# Altium PCB panel_led.PcbDoc (part 1 of 2)
Units mm, origin at the board's own origin, x right, y up, seen from the top; angles counter-clockwise.
Board outline 185.25 x 285.25 mm, 2 copper layers (Top Layer, Bottom Layer); 460 components, 231 nets, 1602 pads, 0 vias.
Unrouted connection lines stored in the file: 3.
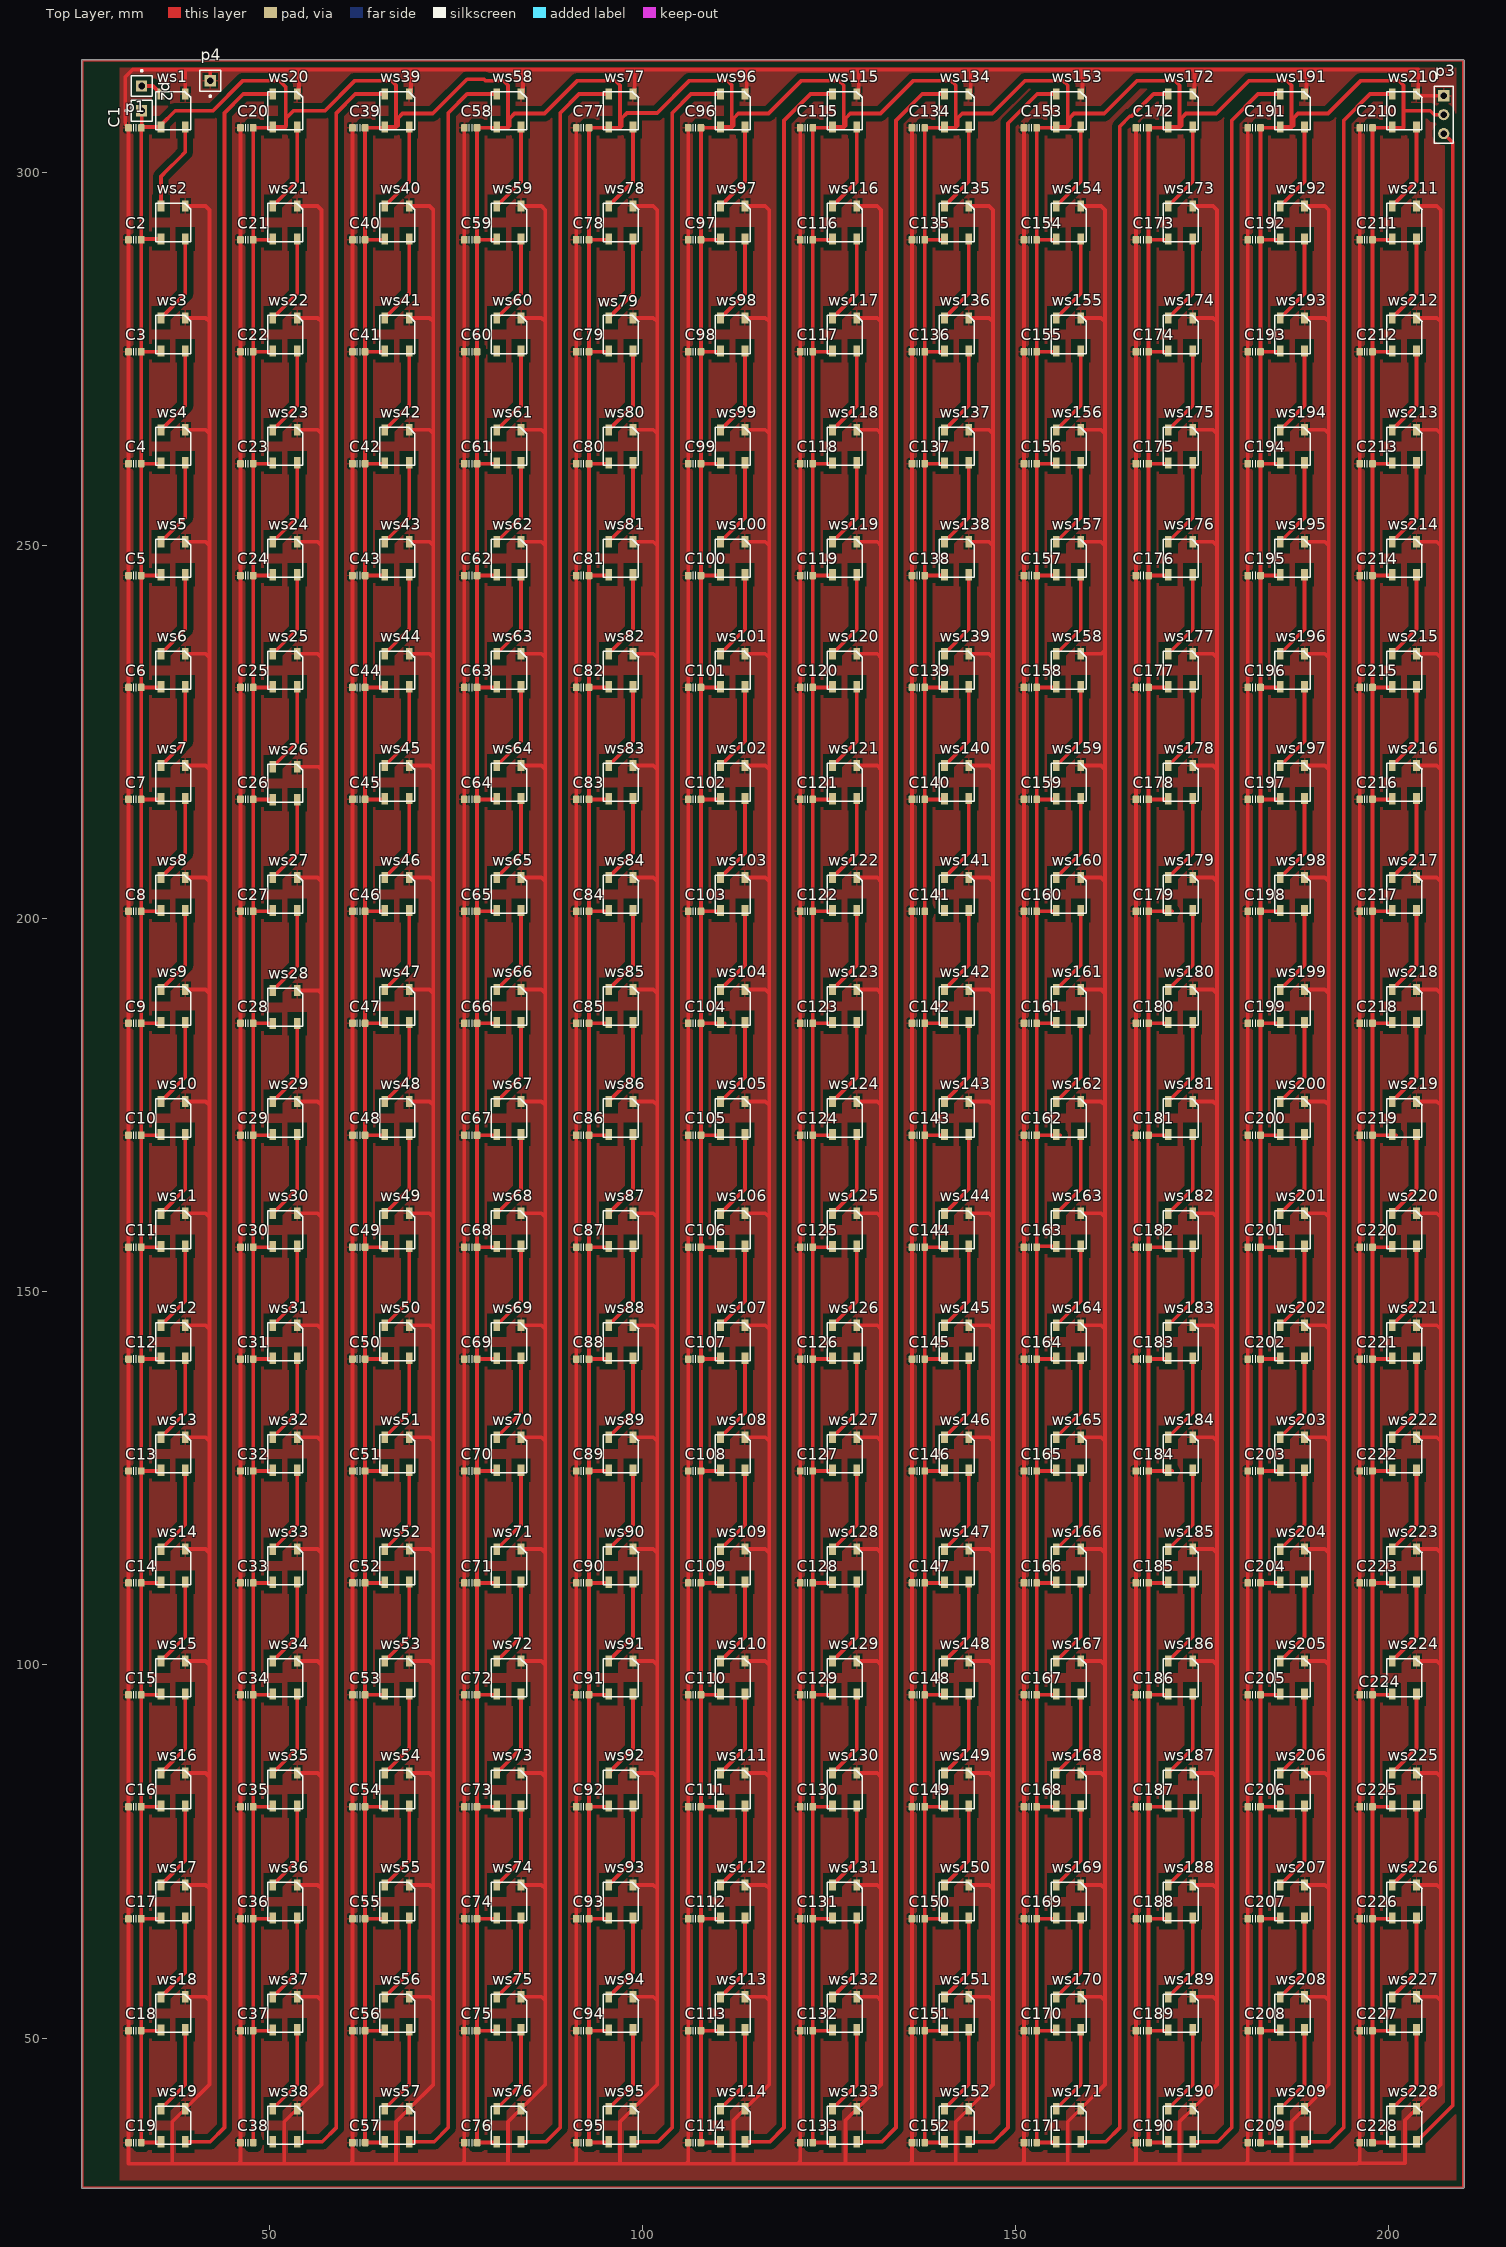
[diagram p0: Top Layer view]
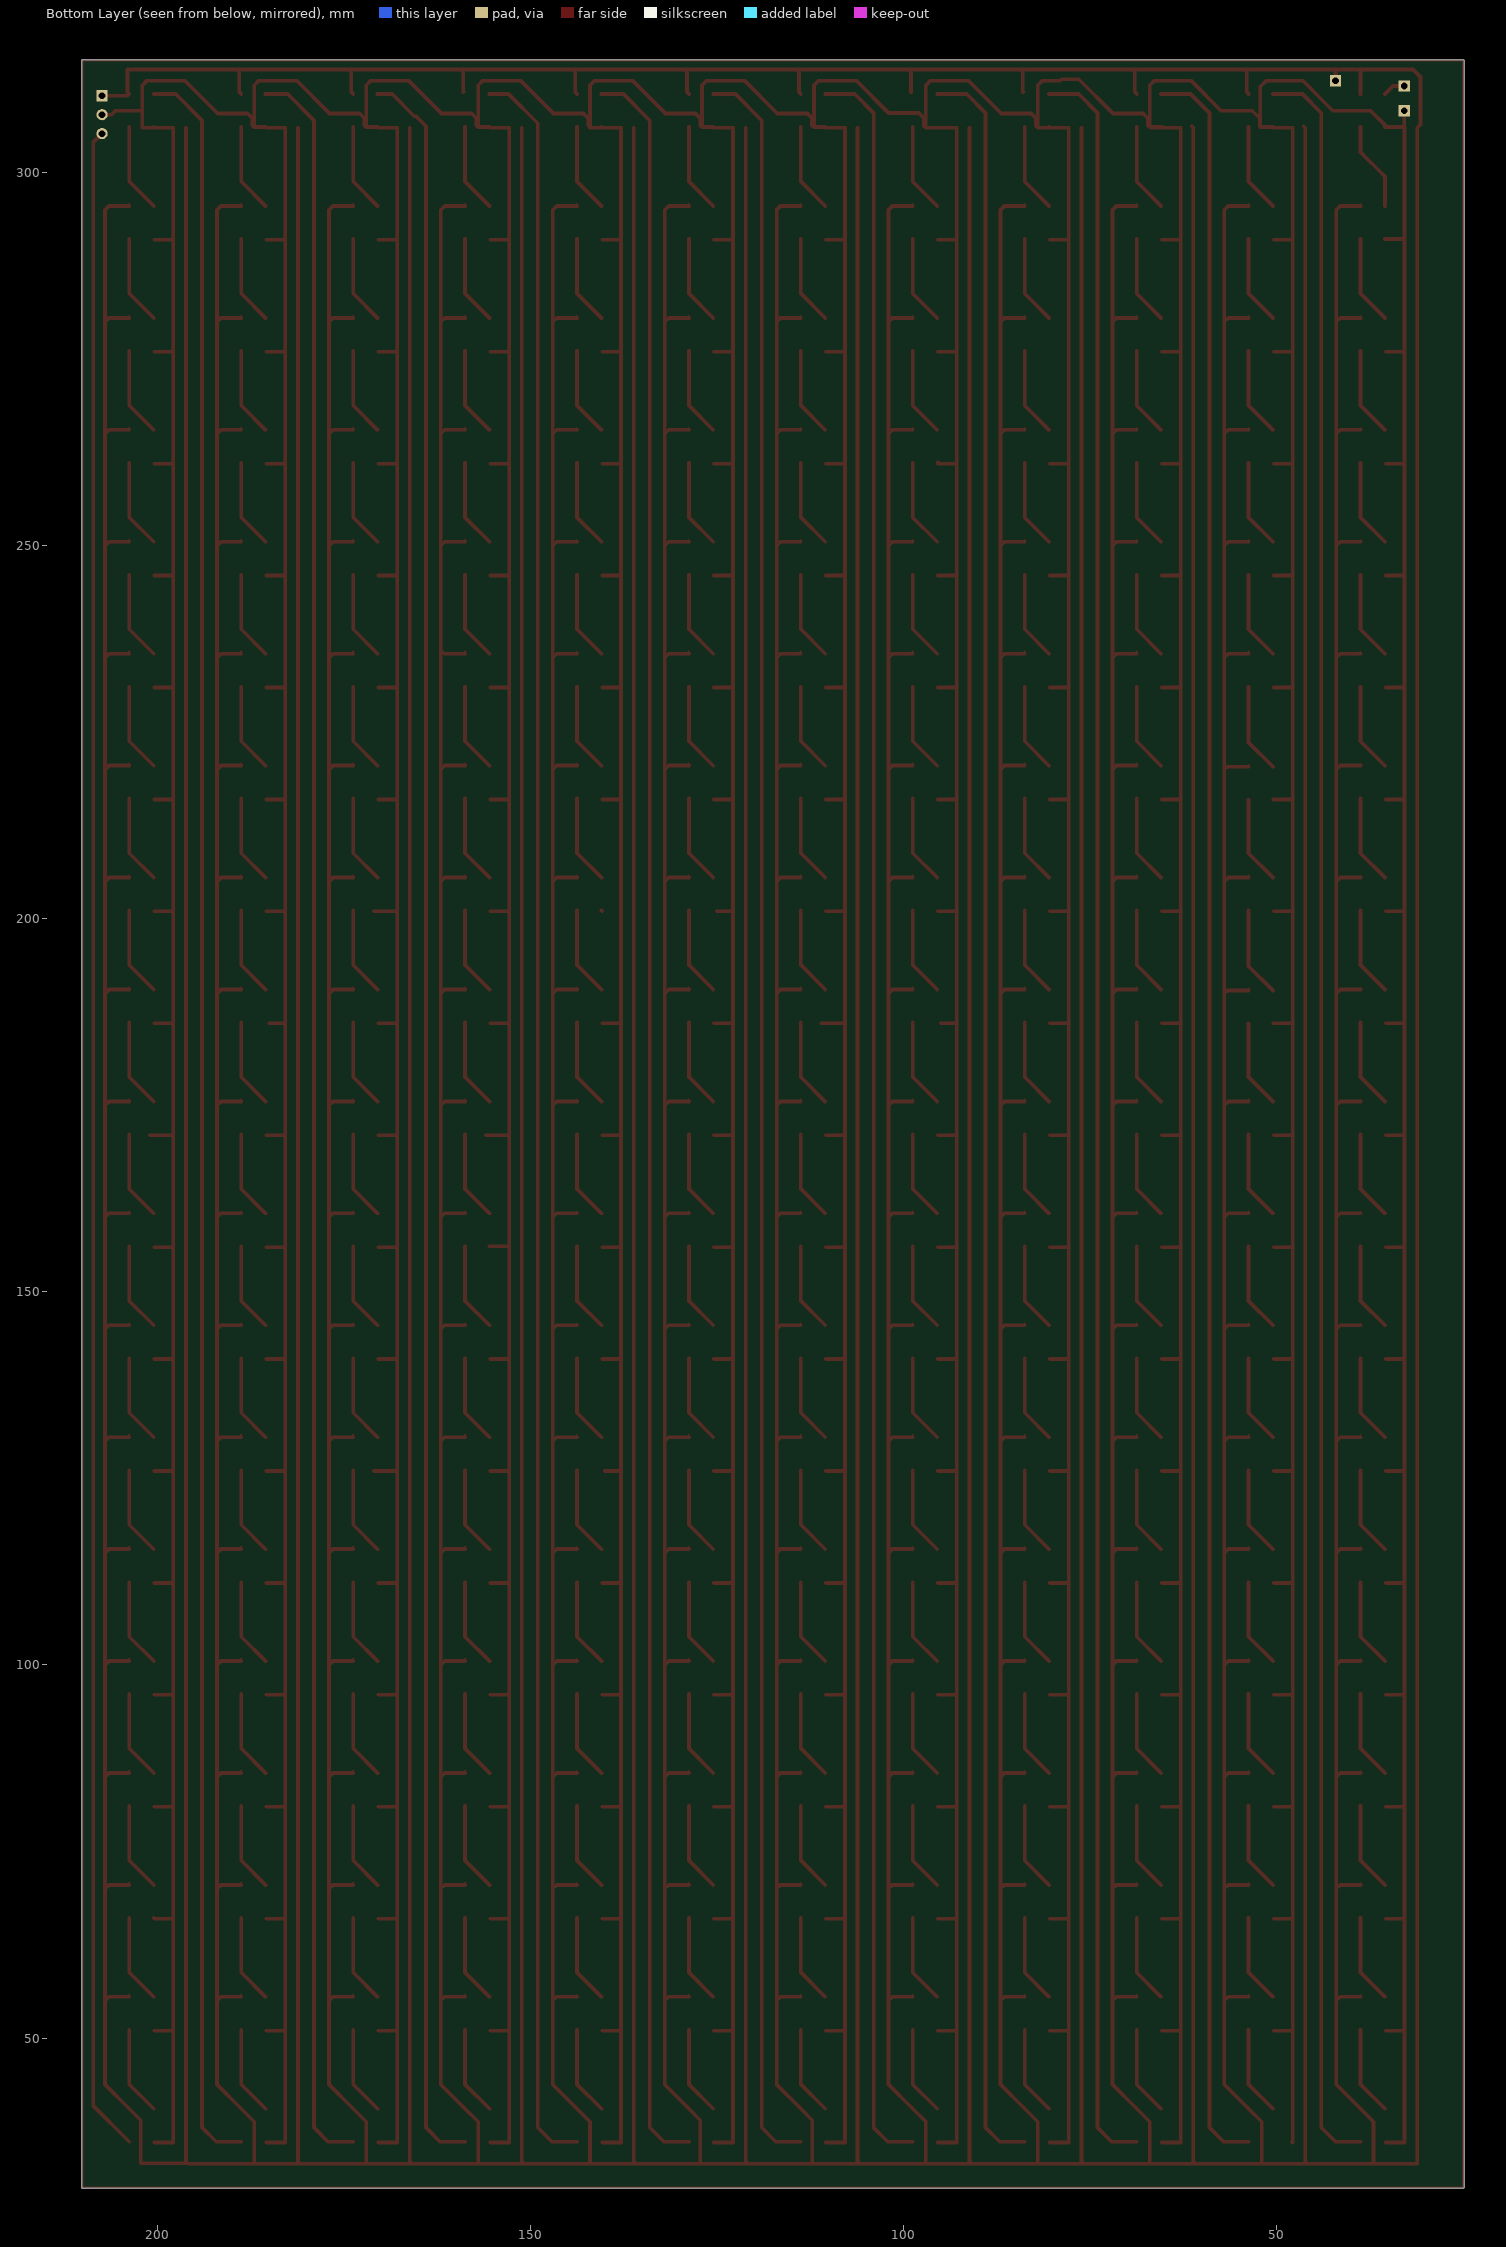
[diagram p1: Bottom Layer view, seen from below]
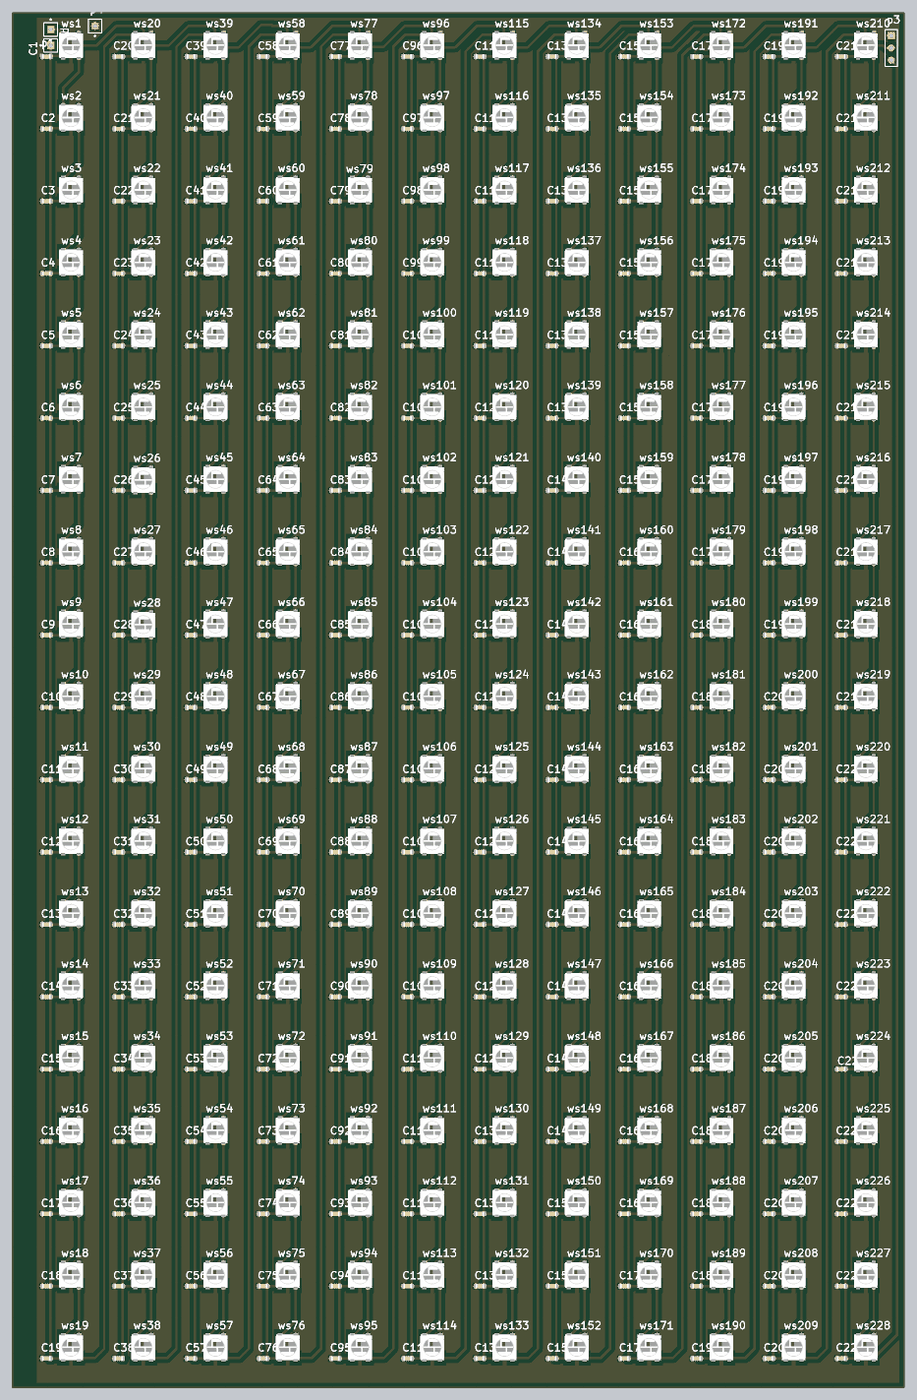
[diagram p3: 3D render of the assembled board from above, using the file's embedded part models]

## Layer stack, top to bottom
Top Solder: solder mask 0.0102, Solder Resist, Dk 3.5
Top Layer: signal copper 0.0356
Dielectric 1: dielectric 0.32, FR-4, Dk 4.8
Bottom Layer: signal copper 0.0356
Bottom Solder: solder mask 0.0102, Solder Resist, Dk 3.5

## Board outline
25,29.873 cw(c25,30) 24.873,30 24.873,315 cw(c25,315) 25,315.127 210,315.127 cw(c210,315) 210.127,315 210.127,30 cw(c210,30) 210,29.873

## Design rules (kind name [scope] priority, off if disabled: settings)
Clearance [All] p1: gap=0.8
PolygonConnect [All] p1: connectstyle=Relief reliefconductorwidth=0.254 reliefentries=4 polygonreliefangle="90 Angle" airgapwidth=0.254
RoutingVias [All] p1: holewidth=0.711 width=1.27 viastyle="Through Hole" minholewidth=0.711 minwidth=1.27 maxholewidth=0.711 maxwidth=1.27
SolderMaskExpansion [All] p1: expansion=0.102
Width [All] p1: maxlimit=1 minlimit=0.5 preferedwidth=0.6
30 further rules are at their usual default settings.

## Classes and differential pairs
component class panel: C1 C2 C3 C4 C5 C6 C7 C8 C9 C10 C11 C12 C13 C14 C15 C16 C17 C18 C19 C20 C21 C22 C23 C24 C25 C26 C27 C28 C29 C30 C31 C32 C33 C34 C35 p1 p2 p4 ws1 ws2 ws3 ws4 ws5 ws6 ws7 ws8 ws9 ws10 ws11 ws12 ws13 ws14 ws15 ws16 ws17 ws18 ws19 ws20 ws21 ws22 ws23 ws24 ws25 ws26 ws27 ws28 ws29 ws30 ws31 ws32 ws33 ws34 ws35
component class panel2: C36 C37 C38 C39 C40 C41 C42 C43 C44 C45 C46 C47 C48 C49 C50 C51 C52 C53 C54 C55 C56 C57 C58 C59 C60 C61 C62 C63 C64 C65 C66 C67 C68 C69 C70 ws36 ws37 ws38 ws39 ws40 ws41 ws42 ws43 ws44 ws45 ws46 ws47 ws48 ws49 ws50 ws51 ws52 ws53 ws54 ws55 ws56 ws57 ws58 ws59 ws60 ws61 ws62 ws63 ws64 ws65 ws66 ws67 ws68 ws69 ws70
component class panel3: C71 C72 C73 C74 C75 C76 C77 C78 C79 C80 C81 C82 C83 C84 C85 C86 C87 C88 C89 C90 C91 C92 C93 C94 C95 C96 C97 C98 C99 C100 C101 C102 C103 C104 C105 ws71 ws72 ws73 ws74 ws75 ws76 ws77 ws78 ws79 ws80 ws81 ws82 ws83 ws84 ws85 ws86 ws87 ws88 ws89 ws90 ws91 ws92 ws93 ws94 ws95 ws96 ws97 ws98 ws99 ws100 ws101 ws102 ws103 ws104 ws105
component class panel4: C106 C107 C108 C109 C110 C111 C112 C113 C114 C115 C116 C117 C118 C119 C120 C121 C122 C123 C124 C125 C126 C127 C128 C129 C130 C131 C132 C133 C134 C135 C136 C137 C138 C139 C140 ws106 ws107 ws108 ws109 ws110 ws111 ws112 ws113 ws114 ws115 ws116 ws117 ws118 ws119 ws120 ws121 ws122 ws123 ws124 ws125 ws126 ws127 ws128 ws129 ws130 ws131 ws132 ws133 ws134 ws135 ws136 ws137 ws138 ws139 ws140
component class panel5: C141 C142 C143 C144 C145 C146 C147 C148 C149 C150 C151 C152 C153 C154 C155 C156 C157 C158 C159 C160 C161 C162 C163 C164 C165 C166 C167 C168 C169 C170 C171 C172 C173 C174 C175 ws141 ws142 ws143 ws144 ws145 ws146 ws147 ws148 ws149 ws150 ws151 ws152 ws153 ws154 ws155 ws156 ws157 ws158 ws159 ws160 ws161 ws162 ws163 ws164 ws165 ws166 ws167 ws168 ws169 ws170 ws171 ws172 ws173 ws174 ws175
component class panel6: C176 C177 C178 C179 C180 C181 C182 C183 C184 C185 C186 C187 C188 C189 C190 C191 C192 C193 C194 C195 C196 C197 C198 C199 C200 C201 C202 C203 C204 C205 C206 C207 C208 C209 C210 ws176 ws177 ws178 ws179 ws180 ws181 ws182 ws183 ws184 ws185 ws186 ws187 ws188 ws189 ws190 ws191 ws192 ws193 ws194 ws195 ws196 ws197 ws198 ws199 ws200 ws201 ws202 ws203 ws204 ws205 ws206 ws207 ws208 ws209 ws210
component class panel7: C211 C212 C213 C214 C215 C216 C217 C218 C219 C220 C221 C222 C223 C224 C225 C226 C227 C228 p3 ws211 ws212 ws213 ws214 ws215 ws216 ws217 ws218 ws219 ws220 ws221 ws222 ws223 ws224 ws225 ws226 ws227 ws228

## Components (designator, comment, footprint, x,y, rotation, side; value= is the part's Value field where it differs from the comment)
C1 "approved sub OK" CAPC1608X90N 32,306 r180 top
C2 "approved sub OK" CAPC1608X90N 32,291 r180 top
C3 "approved sub OK" CAPC1608X90N 32,276 r180 top
C4 "approved sub OK" CAPC1608X90N 32,261 r180 top
C5 "approved sub OK" CAPC1608X90N 32,246 r180 top
C6 "approved sub OK" CAPC1608X90N 32,231 r180 top
C7 "approved sub OK" CAPC1608X90N 32,216 r180 top
C8 "approved sub OK" CAPC1608X90N 32,201 r180 top
C9 "approved sub OK" CAPC1608X90N 32,186 r180 top
C10 "approved sub OK" CAPC1608X90N 32,171 r180 top
C11 "approved sub OK" CAPC1608X90N 32,156 r180 top
C12 "approved sub OK" CAPC1608X90N 32,141 r180 top
C13 "approved sub OK" CAPC1608X90N 32,126 r180 top
C14 "approved sub OK" CAPC1608X90N 32,111 r180 top
C15 "approved sub OK" CAPC1608X90N 32,96 r180 top
C16 "approved sub OK" CAPC1608X90N 32,81 r180 top
C17 "approved sub OK" CAPC1608X90N 32,66 r180 top
C18 "approved sub OK" CAPC1608X90N 32,51 r180 top
C19 "approved sub OK" CAPC1608X90N 32,36 r180 top
C20 "approved sub OK" CAPC1608X90N 47,306 r180 top
C21 "approved sub OK" CAPC1608X90N 47,291 r180 top
C22 "approved sub OK" CAPC1608X90N 47,276 r180 top
C23 "approved sub OK" CAPC1608X90N 47,261 r180 top
C24 "approved sub OK" CAPC1608X90N 47,246 r180 top
C25 "approved sub OK" CAPC1608X90N 47,231 r180 top
C26 "approved sub OK" CAPC1608X90N 47,216 r180 top
C27 "approved sub OK" CAPC1608X90N 47,201 r180 top
C28 "approved sub OK" CAPC1608X90N 47,186 r180 top
C29 "approved sub OK" CAPC1608X90N 47,171 r180 top
C30 "approved sub OK" CAPC1608X90N 47,156 r180 top
C31 "approved sub OK" CAPC1608X90N 47,141 r180 top
C32 "approved sub OK" CAPC1608X90N 47,126 r180 top
C33 "approved sub OK" CAPC1608X90N 47,111 r180 top
C34 "approved sub OK" CAPC1608X90N 47,96 r180 top
C35 "approved sub OK" CAPC1608X90N 47,81 r180 top
C36 "approved sub OK" CAPC1608X90N 47,66 r180 top
C37 "approved sub OK" CAPC1608X90N 47,51 r180 top
C38 "approved sub OK" CAPC1608X90N 47,36 r180 top
C39 "approved sub OK" CAPC1608X90N 62,306 r180 top
C40 "approved sub OK" CAPC1608X90N 62,291 r180 top
C41 "approved sub OK" CAPC1608X90N 62,276 r180 top
C42 "approved sub OK" CAPC1608X90N 62,261 r180 top
C43 "approved sub OK" CAPC1608X90N 62,246 r180 top
C44 "approved sub OK" CAPC1608X90N 62,231 r180 top
C45 "approved sub OK" CAPC1608X90N 62,216 r180 top
C46 "approved sub OK" CAPC1608X90N 62,201 r180 top
C47 "approved sub OK" CAPC1608X90N 62,186 r180 top
C48 "approved sub OK" CAPC1608X90N 62,171 r180 top
C49 "approved sub OK" CAPC1608X90N 62,156 r180 top
C50 "approved sub OK" CAPC1608X90N 62,141 r180 top
C51 "approved sub OK" CAPC1608X90N 62,126 r180 top
C52 "approved sub OK" CAPC1608X90N 62,111 r180 top
C53 "approved sub OK" CAPC1608X90N 62,96 r180 top
C54 "approved sub OK" CAPC1608X90N 62,81 r180 top
C55 "approved sub OK" CAPC1608X90N 62,66 r180 top
C56 "approved sub OK" CAPC1608X90N 62,51 r180 top
C57 "approved sub OK" CAPC1608X90N 62,36 r180 top
C58 "approved sub OK" CAPC1608X90N 77,306 r180 top
C59 "approved sub OK" CAPC1608X90N 77,291 r180 top
C60 "approved sub OK" CAPC1608X90N 77,276 r180 top
C61 "approved sub OK" CAPC1608X90N 77,261 r180 top
C62 "approved sub OK" CAPC1608X90N 77,246 r180 top
C63 "approved sub OK" CAPC1608X90N 77,231 r180 top
C64 "approved sub OK" CAPC1608X90N 77,216 r180 top
C65 "approved sub OK" CAPC1608X90N 77,201 r180 top
C66 "approved sub OK" CAPC1608X90N 77,186 r180 top
C67 "approved sub OK" CAPC1608X90N 77,171 r180 top
C68 "approved sub OK" CAPC1608X90N 77,156 r180 top
C69 "approved sub OK" CAPC1608X90N 77,141 r180 top
C70 "approved sub OK" CAPC1608X90N 77,126 r180 top
C71 "approved sub OK" CAPC1608X90N 77,111 r180 top
C72 "approved sub OK" CAPC1608X90N 77,96 r180 top
C73 "approved sub OK" CAPC1608X90N 77,81 r180 top
C74 "approved sub OK" CAPC1608X90N 77,66 r180 top
C75 "approved sub OK" CAPC1608X90N 77,51 r180 top
C76 "approved sub OK" CAPC1608X90N 77,36 r180 top
C77 "approved sub OK" CAPC1608X90N 92,306 r180 top
C78 "approved sub OK" CAPC1608X90N 92,291 r180 top
C79 "approved sub OK" CAPC1608X90N 92,276 r180 top
C80 "approved sub OK" CAPC1608X90N 92,261 r180 top
C81 "approved sub OK" CAPC1608X90N 92,246 r180 top
C82 "approved sub OK" CAPC1608X90N 92,231 r180 top
C83 "approved sub OK" CAPC1608X90N 92,216 r180 top
C84 "approved sub OK" CAPC1608X90N 92,201 r180 top
C85 "approved sub OK" CAPC1608X90N 92,186 r180 top
C86 "approved sub OK" CAPC1608X90N 92,171 r180 top
C87 "approved sub OK" CAPC1608X90N 92,156 r180 top
C88 "approved sub OK" CAPC1608X90N 92,141 r180 top
C89 "approved sub OK" CAPC1608X90N 92,126 r180 top
C90 "approved sub OK" CAPC1608X90N 92,111 r180 top
C91 "approved sub OK" CAPC1608X90N 92,96 r180 top
C92 "approved sub OK" CAPC1608X90N 92,81 r180 top
C93 "approved sub OK" CAPC1608X90N 92,66 r180 top
C94 "approved sub OK" CAPC1608X90N 92,51 r180 top
C95 "approved sub OK" CAPC1608X90N 92,36 r180 top
C96 "approved sub OK" CAPC1608X90N 107,306 r180 top
C97 "approved sub OK" CAPC1608X90N 107,291 r180 top
C98 "approved sub OK" CAPC1608X90N 107,276 r180 top
C99 "approved sub OK" CAPC1608X90N 107,261 r180 top
C100 "approved sub OK" CAPC1608X90N 107,246 r180 top
C101 "approved sub OK" CAPC1608X90N 107,231 r180 top
C102 "approved sub OK" CAPC1608X90N 107,216 r180 top
C103 "approved sub OK" CAPC1608X90N 107,201 r180 top
C104 "approved sub OK" CAPC1608X90N 107,186 r180 top
C105 "approved sub OK" CAPC1608X90N 107,171 r180 top
C106 "approved sub OK" CAPC1608X90N 107,156 r180 top
C107 "approved sub OK" CAPC1608X90N 107,141 r180 top
C108 "approved sub OK" CAPC1608X90N 107,126 r180 top
C109 "approved sub OK" CAPC1608X90N 107,111 r180 top
C110 "approved sub OK" CAPC1608X90N 107,96 r180 top
C111 "approved sub OK" CAPC1608X90N 107,81 r180 top
C112 "approved sub OK" CAPC1608X90N 107,66 r180 top
C113 "approved sub OK" CAPC1608X90N 107,51 r180 top
C114 "approved sub OK" CAPC1608X90N 107,36 r180 top
C115 "approved sub OK" CAPC1608X90N 122,306 r180 top
C116 "approved sub OK" CAPC1608X90N 122,291 r180 top
C117 "approved sub OK" CAPC1608X90N 122,276 r180 top
C118 "approved sub OK" CAPC1608X90N 122,261 r180 top
C119 "approved sub OK" CAPC1608X90N 122,246 r180 top
C120 "approved sub OK" CAPC1608X90N 122,231 r180 top
C121 "approved sub OK" CAPC1608X90N 122,216 r180 top
C122 "approved sub OK" CAPC1608X90N 122,201 r180 top
C123 "approved sub OK" CAPC1608X90N 122,186 r180 top
C124 "approved sub OK" CAPC1608X90N 122,171 r180 top
C125 "approved sub OK" CAPC1608X90N 122,156 r180 top
C126 "approved sub OK" CAPC1608X90N 122,141 r180 top
C127 "approved sub OK" CAPC1608X90N 122,126 r180 top
C128 "approved sub OK" CAPC1608X90N 122,111 r180 top
C129 "approved sub OK" CAPC1608X90N 122,96 r180 top
C130 "approved sub OK" CAPC1608X90N 122,81 r180 top
C131 "approved sub OK" CAPC1608X90N 122,66 r180 top
C132 "approved sub OK" CAPC1608X90N 122,51 r180 top
C133 "approved sub OK" CAPC1608X90N 122,36 r180 top
C134 "approved sub OK" CAPC1608X90N 137,306 r180 top
C135 "approved sub OK" CAPC1608X90N 137,291 r180 top
C136 "approved sub OK" CAPC1608X90N 137,276 r180 top
C137 "approved sub OK" CAPC1608X90N 137,261 r180 top
C138 "approved sub OK" CAPC1608X90N 137,246 r180 top
C139 "approved sub OK" CAPC1608X90N 137,231 r180 top
C140 "approved sub OK" CAPC1608X90N 137,216 r180 top
C141 "approved sub OK" CAPC1608X90N 137,201 r180 top
C142 "approved sub OK" CAPC1608X90N 137,186 r180 top
C143 "approved sub OK" CAPC1608X90N 137,171 r180 top
C144 "approved sub OK" CAPC1608X90N 137,156 r180 top
C145 "approved sub OK" CAPC1608X90N 137,141 r180 top
C146 "approved sub OK" CAPC1608X90N 137,126 r180 top
C147 "approved sub OK" CAPC1608X90N 137,111 r180 top
C148 "approved sub OK" CAPC1608X90N 137,96 r180 top
C149 "approved sub OK" CAPC1608X90N 137,81 r180 top
C150 "approved sub OK" CAPC1608X90N 137,66 r180 top
C151 "approved sub OK" CAPC1608X90N 137,51 r180 top
C152 "approved sub OK" CAPC1608X90N 137,36 r180 top
C153 "approved sub OK" CAPC1608X90N 152,306 r180 top
C154 "approved sub OK" CAPC1608X90N 152,291 r180 top
C155 "approved sub OK" CAPC1608X90N 152,276 r180 top
C156 "approved sub OK" CAPC1608X90N 152,261 r180 top
C157 "approved sub OK" CAPC1608X90N 152,246 r180 top
C158 "approved sub OK" CAPC1608X90N 152,231 r180 top
C159 "approved sub OK" CAPC1608X90N 152,216 r180 top
C160 "approved sub OK" CAPC1608X90N 152,201 r180 top
C161 "approved sub OK" CAPC1608X90N 152,186 r180 top
C162 "approved sub OK" CAPC1608X90N 152,171 r180 top
C163 "approved sub OK" CAPC1608X90N 152,156 r180 top
C164 "approved sub OK" CAPC1608X90N 152,141 r180 top
C165 "approved sub OK" CAPC1608X90N 152,126 r180 top
C166 "approved sub OK" CAPC1608X90N 152,111 r180 top
C167 "approved sub OK" CAPC1608X90N 152,96 r180 top
C168 "approved sub OK" CAPC1608X90N 152,81 r180 top
C169 "approved sub OK" CAPC1608X90N 152,66 r180 top
C170 "approved sub OK" CAPC1608X90N 152,51 r180 top
C171 "approved sub OK" CAPC1608X90N 152,36 r180 top
C172 "approved sub OK" CAPC1608X90N 167,306 r180 top
C173 "approved sub OK" CAPC1608X90N 167,291 r180 top
C174 "approved sub OK" CAPC1608X90N 167,276 r180 top
C175 "approved sub OK" CAPC1608X90N 167,261 r180 top
C176 "approved sub OK" CAPC1608X90N 167,246 r180 top
C177 "approved sub OK" CAPC1608X90N 167,231 r180 top
C178 "approved sub OK" CAPC1608X90N 167,216 r180 top
C179 "approved sub OK" CAPC1608X90N 167,201 r180 top
C180 "approved sub OK" CAPC1608X90N 167,186 r180 top
C181 "approved sub OK" CAPC1608X90N 167,171 r180 top
C182 "approved sub OK" CAPC1608X90N 167,156 r180 top
C183 "approved sub OK" CAPC1608X90N 167,141 r180 top
C184 "approved sub OK" CAPC1608X90N 167,126 r180 top
C185 "approved sub OK" CAPC1608X90N 167,111 r180 top
C186 "approved sub OK" CAPC1608X90N 167,96 r180 top
C187 "approved sub OK" CAPC1608X90N 167,81 r180 top
C188 "approved sub OK" CAPC1608X90N 167,66 r180 top
C189 "approved sub OK" CAPC1608X90N 167,51 r180 top
C190 "approved sub OK" CAPC1608X90N 167,36 r180 top
C191 "approved sub OK" CAPC1608X90N 182,306 r180 top
C192 "approved sub OK" CAPC1608X90N 182,291 r180 top
C193 "approved sub OK" CAPC1608X90N 182,276 r180 top
C194 "approved sub OK" CAPC1608X90N 182,261 r180 top
C195 "approved sub OK" CAPC1608X90N 182,246 r180 top
C196 "approved sub OK" CAPC1608X90N 182,231 r180 top
C197 "approved sub OK" CAPC1608X90N 182,216 r180 top
C198 "approved sub OK" CAPC1608X90N 182,201 r180 top
C199 "approved sub OK" CAPC1608X90N 182,186 r180 top
C200 "approved sub OK" CAPC1608X90N 182,171 r180 top
C201 "approved sub OK" CAPC1608X90N 182,156 r180 top
C202 "approved sub OK" CAPC1608X90N 182,141 r180 top
C203 "approved sub OK" CAPC1608X90N 182,126 r180 top
C204 "approved sub OK" CAPC1608X90N 182,111 r180 top
C205 "approved sub OK" CAPC1608X90N 182,96 r180 top
C206 "approved sub OK" CAPC1608X90N 182,81 r180 top
C207 "approved sub OK" CAPC1608X90N 182,66 r180 top
C208 "approved sub OK" CAPC1608X90N 182,51 r180 top
C209 "approved sub OK" CAPC1608X90N 182,36 r180 top
C210 "approved sub OK" CAPC1608X90N 197,306 r180 top
C211 "approved sub OK" CAPC1608X90N 197,291 r180 top
C212 "approved sub OK" CAPC1608X90N 197,276 r180 top
C213 "approved sub OK" CAPC1608X90N 197,261 r180 top
C214 "approved sub OK" CAPC1608X90N 197,246 r180 top
C215 "approved sub OK" CAPC1608X90N 197,231 r180 top
C216 "approved sub OK" CAPC1608X90N 197,216 r180 top
C217 "approved sub OK" CAPC1608X90N 197,201 r180 top
C218 "approved sub OK" CAPC1608X90N 197,186 r180 top
C219 "approved sub OK" CAPC1608X90N 197,171 r180 top
C220 "approved sub OK" CAPC1608X90N 197,156 r180 top
C221 "approved sub OK" CAPC1608X90N 197,141 r180 top
C222 "approved sub OK" CAPC1608X90N 197,126 r180 top
C223 "approved sub OK" CAPC1608X90N 197,111 r180 top
C224 "approved sub OK" CAPC1608X90N 197,96 r180 top
C225 "approved sub OK" CAPC1608X90N 197,81 r180 top
C226 "approved sub OK" CAPC1608X90N 197,66 r180 top
C227 "approved sub OK" CAPC1608X90N 197,51 r180 top
C228 "approved sub OK" CAPC1608X90N 197,36 r180 top
p1 "Plug" PIN1 32.9,308.3 r90 top
p2 "Plug" PIN1 32.9,311.6 r0 top
p3 "Header 3" HDR1X3 207.4,310.3 r270 top
p4 "Plug" PIN1 42.1,312.3 r180 top
ws1 "Component_1" SOP4#1 35,306 r90 top
ws2 "Component_1" SOP4#1 35,291 r90 top
ws3 "Component_1" SOP4#1 35,276 r90 top
ws4 "Component_1" SOP4#1 35,261 r90 top
ws5 "Component_1" SOP4#1 35,246 r90 top
ws6 "Component_1" SOP4#1 35,231 r90 top
ws7 "Component_1" SOP4#1 35,216 r90 top
ws8 "Component_1" SOP4#1 35,201 r90 top
ws9 "Component_1" SOP4#1 35,186 r90 top
ws10 "Component_1" SOP4#1 35,171 r90 top
ws11 "Component_1" SOP4#1 35,156 r90 top
ws12 "Component_1" SOP4#1 35,141 r90 top
ws13 "Component_1" SOP4#1 35,126 r90 top
ws14 "Component_1" SOP4#1 35,111 r90 top
ws15 "Component_1" SOP4#1 35,96 r90 top
ws16 "Component_1" SOP4#1 35,81 r90 top
ws17 "Component_1" SOP4#1 35,66 r90 top
ws18 "Component_1" SOP4#1 35,51 r90 top
ws19 "Component_1" SOP4#1 35,36 r90 top
ws20 "Component_1" SOP4#1 50,306 r90 top
ws21 "Component_1" SOP4#1 50,291 r90 top
ws22 "Component_1" SOP4#1 50,276 r90 top
ws23 "Component_1" SOP4#1 50,261 r90 top
ws24 "Component_1" SOP4#1 50,246 r90 top
ws25 "Component_1" SOP4#1 50,231 r90 top
ws26 "Component_1" SOP4#1 50,215.85 r90 top
ws27 "Component_1" SOP4#1 50,201 r90 top
ws28 "Component_1" SOP4#1 50,185.85 r90 top
ws29 "Component_1" SOP4#1 50,171 r90 top
ws30 "Component_1" SOP4#1 50,156 r90 top
ws31 "Component_1" SOP4#1 50,141 r90 top
ws32 "Component_1" SOP4#1 50,126 r90 top
ws33 "Component_1" SOP4#1 50,111 r90 top
ws34 "Component_1" SOP4#1 50,96 r90 top
ws35 "Component_1" SOP4#1 50,81 r90 top
ws36 "Component_1" SOP4#1 50,66 r90 top
ws37 "Component_1" SOP4#1 50,51 r90 top
ws38 "Component_1" SOP4#1 50,36 r90 top
ws39 "Component_1" SOP4#1 65,306 r90 top
ws40 "Component_1" SOP4#1 65,291 r90 top
ws41 "Component_1" SOP4#1 65,276 r90 top
ws42 "Component_1" SOP4#1 65,261 r90 top
ws43 "Component_1" SOP4#1 65,246 r90 top
ws44 "Component_1" SOP4#1 65,231 r90 top
ws45 "Component_1" SOP4#1 65,216 r90 top
ws46 "Component_1" SOP4#1 65,201 r90 top
ws47 "Component_1" SOP4#1 65,186 r90 top
ws48 "Component_1" SOP4#1 65,171 r90 top
ws49 "Component_1" SOP4#1 65,156 r90 top
ws50 "Component_1" SOP4#1 65,141 r90 top
ws51 "Component_1" SOP4#1 65,126 r90 top
ws52 "Component_1" SOP4#1 65,111 r90 top
ws53 "Component_1" SOP4#1 65,96 r90 top
ws54 "Component_1" SOP4#1 65,81 r90 top
ws55 "Component_1" SOP4#1 65,66 r90 top
ws56 "Component_1" SOP4#1 65,51 r90 top
ws57 "Component_1" SOP4#1 65,36 r90 top
ws58 "Component_1" SOP4#2 80,306 r90 top
ws59 "Component_1" SOP4#1 80,291 r90 top
ws60 "Component_1" SOP4#1 80,276 r90 top
ws61 "Component_1" SOP4#1 80,261 r90 top
ws62 "Component_1" SOP4#1 80,246 r90 top
ws63 "Component_1" SOP4#1 80,231 r90 top
ws64 "Component_1" SOP4#1 80,216 r90 top
ws65 "Component_1" SOP4#1 80,201 r90 top
ws66 "Component_1" SOP4#1 80,186 r90 top
ws67 "Component_1" SOP4#1 80,171 r90 top
ws68 "Component_1" SOP4#1 80,156 r90 top
ws69 "Component_1" SOP4#1 80,141 r90 top
ws70 "Component_1" SOP4#1 80,126 r90 top
ws71 "Component_1" SOP4#1 80,111 r90 top
ws72 "Component_1" SOP4#1 80,96 r90 top
ws73 "Component_1" SOP4#1 80,81 r90 top
ws74 "Component_1" SOP4#1 80,66 r90 top
ws75 "Component_1" SOP4#1 80,51 r90 top
ws76 "Component_1" SOP4#1 80,36 r90 top
ws77 "Component_1" SOP4#2 95,306 r90 top
ws78 "Component_1" SOP4#1 95,291 r90 top
ws79 "Component_1" SOP4#1 95,276 r90 top
ws80 "Component_1" SOP4#1 95,261 r90 top
ws81 "Component_1" SOP4#1 95,246 r90 top
ws82 "Component_1" SOP4#1 95,231 r90 top
ws83 "Component_1" SOP4#1 95,216 r90 top
ws84 "Component_1" SOP4#1 95,201 r90 top
ws85 "Component_1" SOP4#1 95,186 r90 top
ws86 "Component_1" SOP4#1 95,171 r90 top
ws87 "Component_1" SOP4#1 95,156 r90 top
ws88 "Component_1" SOP4#1 95,141 r90 top
ws89 "Component_1" SOP4#1 95,126 r90 top
ws90 "Component_1" SOP4#1 95,111 r90 top
ws91 "Component_1" SOP4#1 95,96 r90 top
ws92 "Component_1" SOP4#1 95,81 r90 top
ws93 "Component_1" SOP4#1 95,66 r90 top
ws94 "Component_1" SOP4#1 95,51 r90 top
ws95 "Component_1" SOP4#1 95,36 r90 top
ws96 "Component_1" SOP4#2 110,306 r90 top
ws97 "Component_1" SOP4#1 110,291 r90 top
ws98 "Component_1" SOP4#1 110,276 r90 top
ws99 "Component_1" SOP4#1 110,261 r90 top
ws100 "Component_1" SOP4#1 110,246 r90 top
ws101 "Component_1" SOP4#1 110,231 r90 top
ws102 "Component_1" SOP4#1 110,216 r90 top
ws103 "Component_1" SOP4#1 110,201 r90 top
ws104 "Component_1" SOP4#1 110,186 r90 top
ws105 "Component_1" SOP4#1 110,171 r90 top
ws106 "Component_1" SOP4#1 110,156 r90 top
ws107 "Component_1" SOP4#1 110,141 r90 top
ws108 "Component_1" SOP4#1 110,126 r90 top
ws109 "Component_1" SOP4#1 110,111 r90 top
ws110 "Component_1" SOP4#1 110,96 r90 top
ws111 "Component_1" SOP4#1 110,81 r90 top
ws112 "Component_1" SOP4#1 110,66 r90 top
ws113 "Component_1" SOP4#1 110,51 r90 top
ws114 "Component_1" SOP4#1 110,36 r90 top
ws115 "Component_1" SOP4#2 125,306 r90 top
ws116 "Component_1" SOP4#1 125,291 r90 top
ws117 "Component_1" SOP4#1 125,276 r90 top
ws118 "Component_1" SOP4#1 125,261 r90 top
ws119 "Component_1" SOP4#1 125,246 r90 top
ws120 "Component_1" SOP4#1 125,231 r90 top
ws121 "Component_1" SOP4#1 125,216 r90 top
ws122 "Component_1" SOP4#1 125,201 r90 top
ws123 "Component_1" SOP4#1 125,186 r90 top
ws124 "Component_1" SOP4#1 125,171 r90 top
ws125 "Component_1" SOP4#1 125,156 r90 top
ws126 "Component_1" SOP4#1 125,141 r90 top
ws127 "Component_1" SOP4#1 125,126 r90 top
ws128 "Component_1" SOP4#1 125,111 r90 top
ws129 "Component_1" SOP4#1 125,96 r90 top
ws130 "Component_1" SOP4#1 125,81 r90 top
ws131 "Component_1" SOP4#1 125,66 r90 top
ws132 "Component_1" SOP4#1 125,51 r90 top
ws133 "Component_1" SOP4#1 125,36 r90 top
ws134 "Component_1" SOP4#1 140,306 r90 top
ws135 "Component_1" SOP4#1 140,291 r90 top
ws136 "Component_1" SOP4#1 140,276 r90 top
ws137 "Component_1" SOP4#1 140,261 r90 top
ws138 "Component_1" SOP4#1 140,246 r90 top
ws139 "Component_1" SOP4#1 140,231 r90 top
ws140 "Component_1" SOP4#1 140,216 r90 top
ws141 "Component_1" SOP4#1 140,201 r90 top
ws142 "Component_1" SOP4#1 140,186 r90 top
ws143 "Component_1" SOP4#1 140,171 r90 top
ws144 "Component_1" SOP4#1 140,156 r90 top
ws145 "Component_1" SOP4#1 140,141 r90 top
ws146 "Component_1" SOP4#1 140,126 r90 top
ws147 "Component_1" SOP4#1 140,111 r90 top
ws148 "Component_1" SOP4#1 140,96 r90 top
ws149 "Component_1" SOP4#1 140,81 r90 top
ws150 "Component_1" SOP4#1 140,66 r90 top
ws151 "Component_1" SOP4#1 140,51 r90 top
ws152 "Component_1" SOP4#1 140,36 r90 top
ws153 "Component_1" SOP4#2 155,306 r90 top
ws154 "Component_1" SOP4#1 155,291 r90 top
ws155 "Component_1" SOP4#1 155,276 r90 top
ws156 "Component_1" SOP4#1 155,261 r90 top
ws157 "Component_1" SOP4#1 155,246 r90 top
ws158 "Component_1" SOP4#1 155,231 r90 top
ws159 "Component_1" SOP4#1 155,216 r90 top
ws160 "Component_1" SOP4#1 155,201 r90 top
ws161 "Component_1" SOP4#1 155,186 r90 top
ws162 "Component_1" SOP4#1 155,171 r90 top
ws163 "Component_1" SOP4#1 155,156 r90 top
ws164 "Component_1" SOP4#1 155,141 r90 top
ws165 "Component_1" SOP4#1 155,126 r90 top
ws166 "Component_1" SOP4#1 155,111 r90 top
ws167 "Component_1" SOP4#1 155,96 r90 top
ws168 "Component_1" SOP4#1 155,81 r90 top
ws169 "Component_1" SOP4#1 155,66 r90 top
ws170 "Component_1" SOP4#1 155,51 r90 top
ws171 "Component_1" SOP4#1 155,36 r90 top
ws172 "Component_1" SOP4#2 170,306 r90 top
ws173 "Component_1" SOP4#1 170,291 r90 top
ws174 "Component_1" SOP4#1 170,276 r90 top
ws175 "Component_1" SOP4#1 170,261 r90 top
ws176 "Component_1" SOP4#1 170,246 r90 top
ws177 "Component_1" SOP4#1 170,231 r90 top
ws178 "Component_1" SOP4#1 170,216 r90 top
ws179 "Component_1" SOP4#1 170,201 r90 top
ws180 "Component_1" SOP4#1 170,186 r90 top
ws181 "Component_1" SOP4#1 170,171 r90 top
ws182 "Component_1" SOP4#1 170,156 r90 top
ws183 "Component_1" SOP4#1 170,141 r90 top
ws184 "Component_1" SOP4#1 170,126 r90 top
ws185 "Component_1" SOP4#1 170,111 r90 top
ws186 "Component_1" SOP4#1 170,96 r90 top
ws187 "Component_1" SOP4#1 170,81 r90 top
ws188 "Component_1" SOP4#1 170,66 r90 top
ws189 "Component_1" SOP4#1 170,51 r90 top
ws190 "Component_1" SOP4#1 170,36 r90 top
ws191 "Component_1" SOP4#2 185,306 r90 top
ws192 "Component_1" SOP4#1 185,291 r90 top
ws193 "Component_1" SOP4#1 185,276 r90 top
ws194 "Component_1" SOP4#1 185,261 r90 top
ws195 "Component_1" SOP4#1 185,246 r90 top
ws196 "Component_1" SOP4#1 185,231 r90 top
ws197 "Component_1" SOP4#1 185,216 r90 top
ws198 "Component_1" SOP4#1 185,201 r90 top
ws199 "Component_1" SOP4#1 185,186 r90 top
ws200 "Component_1" SOP4#1 185,171 r90 top
ws201 "Component_1" SOP4#1 185,156 r90 top
ws202 "Component_1" SOP4#1 185,141 r90 top
ws203 "Component_1" SOP4#1 185,126 r90 top
ws204 "Component_1" SOP4#1 185,111 r90 top
ws205 "Component_1" SOP4#1 185,96 r90 top
ws206 "Component_1" SOP4#1 185,81 r90 top
ws207 "Component_1" SOP4#1 185,66 r90 top
ws208 "Component_1" SOP4#1 185,51 r90 top
ws209 "Component_1" SOP4#1 185,36 r90 top
ws210 "Component_1" SOP4#2 200,306 r90 top
ws211 "Component_1" SOP4#1 200,291 r90 top
ws212 "Component_1" SOP4#1 200,276 r90 top
ws213 "Component_1" SOP4#1 200,261 r90 top
ws214 "Component_1" SOP4#1 200,246 r90 top
ws215 "Component_1" SOP4#1 200,231 r90 top
ws216 "Component_1" SOP4#1 200,216 r90 top
ws217 "Component_1" SOP4#1 200,201 r90 top
ws218 "Component_1" SOP4#1 200,186 r90 top
ws219 "Component_1" SOP4#1 200,171 r90 top
ws220 "Component_1" SOP4#1 200,156 r90 top
ws221 "Component_1" SOP4#1 200,141 r90 top
ws222 "Component_1" SOP4#1 200,126 r90 top
ws223 "Component_1" SOP4#1 200,111 r90 top
ws224 "Component_1" SOP4#1 200,96 r90 top
ws225 "Component_1" SOP4#1 200,81 r90 top
ws226 "Component_1" SOP4#1 200,66 r90 top
ws227 "Component_1" SOP4#1 200,51 r90 top
ws228 "Component_1" SOP4#1 200,36 r90 top

## Footprints (in the part's own frame and the unit in brackets; to place one, negate y for a bottom-side part, rotate by r counter-clockwise, add the part's x,y. Pads: shape width x height; smd on the part's side, far side on the other; paste and mask are expansions set on the pad)
CAPC1608X90N [mm] "Chip Capacitor, Body 1.6x0.8mm, EIA 0603, IPC Medium Density"
  round 0.254 on Mech15: 0(0,0)
  rrect25% 0.9x1 smd: 1(-0.85,0) 2(0.85,0)
  Top Layer pour cut-out: -0.6,0.5 -0.4,0.7 0.4,0.7 0.6,0.5 0.6,-0.5 0.4,-0.7 -0.4,-0.7 -0.6,-0.5
  silkscreen extent -0.18,-0.48 0.18,0.48, body extent -0.85,-0.45 0.85,0.45, height 0.89
HDR1X3 [mm] "Connector; Header; 3 Position"
  rect 1.5x1.5 hole 0.9: 1(0,0)
  round 1.5 hole 0.9: 2(2.54,0) 3(5.08,0)
  silkscreen extent -1.27,-1.27 6.35,1.27
PIN1 [mm] "Connector; Plug"
  rect 1.5x1.5 hole 0.9: 1(0,0)
  silkscreen extent -1.4,-1.4 1.4,2.17
SOP4#1 [mm]
  rect 1.5x0.9 smd: 1(0.1,-0.484) 2(0.106,-3.751) 3(4.53,-3.751) 4(4.524,-0.484)
  Top Layer lines w0.254: 4.773,-3.786 4.8,-3.786
  silkscreen extent -0.25,-4.48 4.87,0.22, body extent -0.36,-4.58 4.99,0.37, height 1.7
SOP4#2 [mm]
  rect 1.5x0.9 smd: 1(0.1,-0.484) 2(0.106,-3.751) 3(4.53,-3.751) 4(4.524,-0.484)
  Top Layer lines w0.254: 4.773,-3.786 4.778,-3.786 4.8,-3.786
  silkscreen extent -0.25,-4.48 4.87,0.22, body extent -0.36,-4.58 4.99,0.37, height 1.7

## Part data
C1 C2 C3 C4 C5 C6 C7 C8 C9 C10 C11 C12 C13 C14 C15 C16 C17 C18 C19 C20 C21 C22 C23 C24 C25 C26 C27 C28 C29 C30 C31 C32 C33 C34 C35 C36 C37 C38 C39 C40 C41 C42 C43 C44 C45 C46 C47 C48 C49 C50 C51 C52 C53 C54 C55 C56 C57 C58 C59 C60 C61 C62 C63 C64 C65 C66 C67 C68 C69 C70 C71 C72 C73 C74 C75 C76 C77 C78 C79 C80 C81 C82 C83 C84 C85 C86 C87 C88 C89 C90 C91 C92 C93 C94 C95 C96 C97 C98 C99 C100 C101 C102 C103 C104 C105 C106 C107 C108 C109 C110 C111 C112 C113 C114 C115 C116 C117 C118 C119 C120 C121 C122 C123 C124 C125 C126 C127 C128 C129 C130 C131 C132 C133 C134 C135 C136 C137 C138 C139 C140 C141 C142 C143 C144 C145 C146 C147 C148 C149 C150 C151 C152 C153 C154 C155 C156 C157 C158 C159 C160 C161 C162 C163 C164 C165 C166 C167 C168 C169 C170 C171 C172 C173 C174 C175 C176 C177 C178 C179 C180 C181 C182 C183 C184 C185 C186 C187 C188 C189 C190 C191 C192 C193 C194 C195 C196 C197 C198 C199 C200 C201 C202 C203 C204 C205 C206 C207 C208 C209 C210 C211 C212 C213 C214 C215 C216 C217 C218 C219 C220 C221 C222 C223 C224 C225 C226 C227 C228: library part CAPC_10n_0603_X7R_100V_10%, "Capacitor SMD Cer 10nF 10% 100V X7R 0603"
p3: "Header, 3-Pin"

## Nets (pads, with @x,y where several pads share a name; then routed paths per layer and width w, separated by ;. In a path a pad name is that pad's centre, name@x,y a point inside that pad or via, vN(x,y) a via of type N, cw(c..) or ccw(c..) an arc to the next point about the centre after c; other vN are vias at no path point)
GND: C1.2 C2.2 C3.2 C4.2 C5.2 C6.2 C7.2 C8.2 C9.2 C10.2 C11.2 C12.2 C13.2 C14.2 C15.2 C16.2 C17.2 C18.2 C19.2 C20.2 C21.2 C22.2 C23.2 C24.2 C25.2 C26.2 C27.2 C28.2 C29.2 C30.2 C31.2 C32.2 C33.2 C34.2 C35.2 C36.2 C37.2 C38.2 C39.2 C40.2 C41.2 C42.2 C43.2 C44.2 C45.2 C46.2 C47.2 C48.2 C49.2 C50.2 C51.2 C52.2 C53.2 C54.2 C55.2 C56.2 C57.2 C58.2 C59.2 C60.2 C61.2 C62.2 C63.2 C64.2 C65.2 C66.2 C67.2 C68.2 C69.2 C70.2 C71.2 C72.2 C73.2 C74.2 C75.2 C76.2 C77.2 C78.2 C79.2 C80.2 C81.2 C82.2 C83.2 C84.2 C85.2 C86.2 C87.2 C88.2 C89.2 C90.2 C91.2 C92.2 C93.2 C94.2 C95.2 C96.2 C97.2 C98.2 C99.2 C100.2 C101.2 C102.2 C103.2 C104.2 C105.2 C106.2 C107.2 C108.2 C109.2 C110.2 C111.2 C112.2 C113.2 C114.2 C115.2 C116.2 C117.2 C118.2 C119.2 C120.2 C121.2 C122.2 C123.2 C124.2 C125.2 C126.2 C127.2 C128.2 C129.2 C130.2 C131.2 C132.2 C133.2 C134.2 C135.2 C136.2 C137.2 C138.2 C139.2 C140.2 C141.2 C142.2 C143.2 C144.2 C145.2 C146.2 C147.2 C148.2 C149.2 C150.2 C151.2 C152.2 C153.2 C154.2 C155.2 C156.2 C157.2 C158.2 C159.2 C160.2 C161.2 C162.2 C163.2 C164.2 C165.2 C166.2 C167.2 C168.2 C169.2 C170.2 C171.2 C172.2 C173.2 C174.2 C175.2 C176.2 C177.2 C178.2 C179.2 C180.2 C181.2 C182.2 C183.2 C184.2 C185.2 C186.2 C187.2 C188.2 C189.2 C190.2 C191.2 C192.2 C193.2 C194.2 C195.2 C196.2 C197.2 C198.2 C199.2 C200.2 C201.2 C202.2 C203.2 C204.2 C205.2 C206.2 C207.2 C208.2 C209.2 C210.2 C211.2 C212.2 C213.2 C214.2 C215.2 C216.2 C217.2 C218.2 C219.2 C220.2 C221.2 C222.2 C223.2 C224.2 C225.2 C226.2 C227.2 C228.2 p3.1 p4.1 ws1.3 ws2.3 ws3.3 ws4.3 ws5.3 ws6.3 ws7.3 ws8.3 ws9.3 ws10.3 ws11.3 ws12.3 ws13.3 ws14.3 ws15.3 ws16.3 ws17.3 ws18.3 ws19.3 ws20.3 ws21.3 ws22.3 ws23.3 ws24.3 ws25.3 ws26.3 ws27.3 ws28.3 ws29.3 ws30.3 ws31.3 ws32.3 ws33.3 ws34.3 ws35.3 ws36.3 ws37.3 ws38.3 ws39.3 ws40.3 ws41.3 ws42.3 ws43.3 ws44.3 ws45.3 ws46.3 ws47.3 ws48.3 ws49.3 ws50.3 ws51.3 ws52.3 ws53.3 ws54.3 ws55.3 ws56.3 ws57.3 ws58.3 ws59.3 ws60.3 ws61.3 ws62.3 ws63.3 ws64.3 ws65.3 ws66.3 ws67.3 ws68.3 ws69.3 ws70.3 ws71.3 ws72.3 ws73.3 ws74.3 ws75.3 ws76.3 ws77.3 ws78.3 ws79.3 ws80.3 ws81.3 ws82.3 ws83.3 ws84.3 ws85.3 ws86.3 ws87.3 ws88.3 ws89.3 ws90.3 ws91.3 ws92.3 ws93.3 ws94.3 ws95.3 ws96.3 ws97.3 ws98.3 ws99.3 ws100.3 ws101.3 ws102.3 ws103.3 ws104.3 ws105.3 ws106.3 ws107.3 ws108.3 ws109.3 ws110.3 ws111.3 ws112.3 ws113.3 ws114.3 ws115.3 ws116.3 ws117.3 ws118.3 ws119.3 ws120.3 ws121.3 ws122.3 ws123.3 ws124.3 ws125.3 ws126.3 ws127.3 ws128.3 ws129.3 ws130.3 ws131.3 ws132.3 ws133.3 ws134.3 ws135.3 ws136.3 ws137.3 ws138.3 ws139.3 ws140.3 ws141.3 ws142.3 ws143.3 ws144.3 ws145.3 ws146.3 ws147.3 ws148.3 ws149.3 ws150.3 ws151.3 ws152.3 ws153.3 ws154.3 ws155.3 ws156.3 ws157.3 ws158.3 ws159.3 ws160.3 ws161.3 ws162.3 ws163.3 ws164.3 ws165.3 ws166.3 ws167.3 ws168.3 ws169.3 ws170.3 ws171.3 ws172.3 ws173.3 ws174.3 ws175.3 ws176.3 ws177.3 ws178.3 ws179.3 ws180.3 ws181.3 ws182.3 ws183.3 ws184.3 ws185.3 ws186.3 ws187.3 ws188.3 ws189.3 ws190.3 ws191.3 ws192.3 ws193.3 ws194.3 ws195.3 ws196.3 ws197.3 ws198.3 ws199.3 ws200.3 ws201.3 ws202.3 ws203.3 ws204.3 ws205.3 ws206.3 ws207.3 ws208.3 ws209.3 ws210.3 ws211.3 ws212.3 ws213.3 ws214.3 ws215.3 ws216.3 ws217.3 ws218.3 ws219.3 ws220.3 ws221.3 ws222.3 ws223.3 ws224.3 ws225.3 ws226.3 ws227.3 ws228.3 | length 7547.4
  Top Layer w0.5: ws18.3@38.751,55.53 41.47,55.53 42,55 ; ws17.3@38.751,70.53 41.47,70.53 42,70 ; ws16.3@38.751,85.53 41.47,85.53 42,85 ; ws15.3@38.751,100.53 41.47,100.53 42,100 ; ws14.3@38.751,115.529 41.471,115.529 42,115 ; ws13.3@38.751,130.53 41.47,130.53 42,130 ; ws12.3@38.751,145.529 41.471,145.529 42,145 ; ws11.3@38.751,160.53 41.47,160.53 42,160 ; ws10.3@38.751,175.53 41.47,175.53 42,175 ; ws9.3@38.751,190.53 41.47,190.53 42,190 ; ws8.3@38.751,205.53 41.47,205.53 42,205 ; ws7.3@38.751,220.529 41.471,220.529 42,220 ; ws6.3@38.751,235.53 41.47,235.53 42,235 ; ws5.3@38.751,250.53 41.47,250.53 42,250 ; ws4.3@38.751,265.53 41.47,265.53 42,265 ; ws3.3@38.751,280.53 41.47,280.53 42,280 ; ws2.3@38.751,295.529 41.471,295.529 42,295 42,280 ; ws1.3@38.751,310.53 38.751,313.574 38.503,313.823 ; ws1.3@38.786,310.564 ws1.3@38.786,310.773 ; p4.1@42.1,312.3 42.1,313.623 42.3,313.823 ; C20.2@46.35,306.2 C20.2@46.15,306 C32.2@46.15,126 46.15,33.45 45.85,33.15 ; ws37.3@53.751,55.53 56.47,55.53 57,55 ; ws36.3@53.751,70.529 56.471,70.529 57,70 ; ws35.3@53.751,85.53 56.47,85.53 57,85 ; ws34.3@53.751,100.53 56.47,100.53 57,100 ; ws33.3@53.751,115.53 56.47,115.53 57,115 ; ws32.3@53.751,130.53 56.47,130.53 57,130 ; ws31.3@53.751,145.529 56.471,145.529 57,145 ; ws30.3@53.751,160.53 56.47,160.53 57,160 ; ws29.3@53.751,175.53 56.47,175.53 57,175 ; ws28.3@53.751,190.38 56.62,190.38 57,190 ; ws27.3@53.751,205.53 56.47,205.53 57,205 ; ws26.3@53.751,220.379 56.621,220.379 57,220 ; ws25.3@53.751,235.53 56.47,235.53 57,235 ; ws24.3@53.751,250.529 56.471,250.529 57,250 ; ws23.3@53.751,265.53 56.47,265.53 57,265 ; ws22.3@53.751,280.53 56.47,280.53 57,280 ; ws21.3@53.751,295.529 56.471,295.529 57,295 57,280 ; ws20.3@53.751,310.53 54,310.778 54,313.823 ; C39.2@61.35,306.2 C39.2@61.15,306 C51.2@61.15,126 C57.2@61.15,36 61.15,33.45 60.85,33.15 ; ws56.3@68.751,55.53 71.47,55.53 72,55 ; ws55.3@68.751,70.529 71.471,70.529 72,70 ; ws54.3@68.751,85.53 71.47,85.53 72,85 ; ws53.3@68.751,100.53 71.47,100.53 72,100 ; ws52.3@68.751,115.53 71.47,115.53 72,115 ; ws51.3@68.751,130.53 71.47,130.53 72,130 ; ws50.3@68.751,145.529 71.471,145.529 72,145 ; ws49.3@68.751,160.53 71.47,160.53 72,160 ; ws48.3@68.751,175.529 71.471,175.529 72,175 ; ws47.3@68.751,190.53 71.47,190.53 72,190 ; ws46.3@68.751,205.53 71.47,205.53 72,205 ; ws45.3@68.751,220.53 71.47,220.53 72,220 ; ws44.3@68.751,235.53 71.47,235.53 72,235 ; ws43.3@68.751,250.529 71.471,250.529 72,250 ; ws42.3@68.751,265.53 71.47,265.53 72,265 ; ws41.3@68.751,280.529 71.47,280.529 72,280 ; ws40.3@68.751,295.53 71.47,295.53 72,295 72,280 ; ws39.3@68.751,310.53 69,310.778 69,313.823 ; C58.2@76.15,306 C70.2@76.15,126 C76.2@76.15,36 76.15,33.45 75.85,33.15 ; ws75.3@83.751,55.53 86.47,55.53 87,55 ; ws74.3@83.751,70.529 86.471,70.529 87,70 ; ws73.3@83.751,85.53 86.47,85.53 87,85 ; ws72.3@83.751,100.529 86.471,100.529 87,100 ; ws71.3@83.751,115.53 86.47,115.53 87,115 ; ws70.3@83.751,130.53 86.47,130.53 87,130 ; ws69.3@83.751,145.53 86.47,145.53 87,145 ; ws68.3@83.751,160.53 86.47,160.53 87,160 ; ws67.3@83.751,175.529 86.471,175.529 87,175 ; ws66.3@83.751,190.53 86.47,190.53 87,190 ; ws65.3@83.751,205.53 86.47,205.53 87,205 ; ws64.3@83.751,220.53 86.47,220.53 87,220 ; ws63.3@83.751,235.53 86.47,235.53 87,235 ; ws62.3@83.751,250.529 86.471,250.529 87,250 ; ws61.3@83.751,265.53 86.47,265.53 87,265 ; ws60.3@83.751,280.529 86.471,280.529 87,280 ; ws59.3@83.751,295.53 86.47,295.53 87,295 87,280 ; ws58.3@84,310.778 84,313.823 ; C77.2@91.15,306 C89.2@91.15,126 91.15,33.45 90.85,33.15 ; ws94.3@98.751,55.53 101.47,55.53 102,55 ; ws93.3@98.751,70.53 101.47,70.53 102,70 ; ws92.3@98.751,85.53 101.47,85.53 102,85 ; ws91.3@98.751,100.529 101.471,100.529 102,100 ; ws90.3@98.751,115.53 101.47,115.53 102,115 ; ws89.3@98.751,130.53 101.47,130.53 102,130 ; ws88.3@98.751,145.53 101.47,145.53 102,145 ; ws87.3@98.751,160.53 101.47,160.53 102,160 ; ws86.3@98.751,175.529 101.471,175.529 102,175 ; ws85.3@98.751,190.53 101.47,190.53 102,190 ; ws84.3@98.751,205.529 101.471,205.529 102,205 ; ws83.3@98.751,220.53 101.47,220.53 102,220 ; ws82.3@98.751,235.53 101.47,235.53 102,235 ; ws81.3@98.751,250.53 101.47,250.53 102,250 ; ws80.3@98.751,265.53 101.47,265.53 102,265 ; ws79.3@98.751,280.529 101.471,280.529 102,280 ; ws78.3@98.751,295.53 101.47,295.53 102,295 102,280 ; ws77.3@99,310.778 99,313.823 ; C96.2@106.15,306 C108.2@106.15,126 106.15,33.45 105.85,33.15 ; ws113.3@113.751,55.53 116.47,55.53 117,55 ; ws112.3@113.751,70.53 116.47,70.53 117,70 ; ws111.3@113.751,85.53 116.47,85.53 117,85 ; ws110.3@113.751,100.529 116.471,100.529 117,100 ; ws109.3@113.751,115.53 116.47,115.53 117,115 ; ws108.3@113.751,130.529 116.471,130.529 117,130 ; ws107.3@113.751,145.53 116.47,145.53 117,145 ; ws106.3@113.751,160.53 116.47,160.53 117,160 ; ws105.3@113.751,175.53 116.47,175.53 117,175 ; ws104.3@113.751,190.53 116.47,190.53 117,190 ; ws103.3@113.751,205.529 116.471,205.529 117,205 ; ws102.3@113.751,220.53 116.47,220.53 117,220 ; ws101.3@113.751,235.53 116.47,235.53 117,235 ; ws100.3@113.751,250.53 116.47,250.53 117,250 ; ws99.3@113.751,265.53 116.47,265.53 117,265 ; ws98.3@113.751,280.529 116.471,280.529 117,280 ; ws97.3@113.751,295.53 116.47,295.53 117,295 117,280 ; ws96.3@113.751,310.529 114,310.778 114,313.823 ; C115.2@121.15,306 C133.2@121.15,36 121.15,33.45 120.85,33.15 ; ws132.3@128.751,55.529 131.471,55.529 132,55 ; ws131.3@128.751,70.53 131.47,70.53 132,70 ; ws130.3@128.751,85.53 131.47,85.53 132,85 ; ws129.3@128.751,100.53 131.47,100.53 132,100 ; ws128.3@128.751,115.53 131.47,115.53 132,115 ; ws127.3@128.751,130.529 131.471,130.529 132,130 ; ws126.3@128.751,145.53 131.47,145.53 132,145 ; ws125.3@128.751,160.53 131.47,160.53 132,160 ; ws124.3@128.751,175.53 131.47,175.53 132,175 ; ws123.3@128.751,190.53 131.47,190.53 132,190 ; ws122.3@128.751,205.529 131.471,205.529 132,205 ; ws121.3@128.751,220.53 131.47,220.53 132,220 ; ws120.3@128.751,235.529 131.471,235.529 132,235 ; ws119.3@128.751,250.53 131.47,250.53 132,250 ; ws118.3@128.751,265.53 131.47,265.53 132,265 ; ws117.3@128.751,280.53 131.47,280.53 132,280 ; ws116.3@128.751,295.53 131.47,295.53 132,295 132,280 ; ws115.3@128.751,310.529 129,310.778 129,313.823 ; C134.2@136.15,306 C140.2@136.15,216 C152.2@136.15,36 136.15,33.45 135.85,33.15 ; ws151.3@143.751,55.529 146.471,55.529 147,55 ; ws150.3@143.751,70.53 146.47,70.53 147,70 ; ws149.3@143.751,85.53 146.47,85.53 147,85 ; ws148.3@143.751,100.53 146.47,100.53 147,100 ; ws147.3@143.751,115.53 146.47,115.53 147,115 ; ws146.3@143.751,130.529 146.471,130.529 147,130 ; ws145.3@143.751,145.53 146.47,145.53 147,145 ; ws144.3@143.751,160.529 146.471,160.529 147,160 ; ws143.3@143.751,175.53 146.47,175.53 147,175 ; ws142.3@143.751,190.53 146.47,190.53 147,190 ; ws141.3@143.751,205.53 146.47,205.53 147,205 ; ws140.3@143.751,220.53 146.47,220.53 147,220 ; ws139.3@143.751,235.529 146.471,235.529 147,235 ; ws138.3@143.751,250.53 146.47,250.53 147,250 ; ws137.3@143.751,265.53 146.47,265.53 147,265 ; ws136.3@143.751,280.53 146.47,280.53 147,280 ; ws135.3@143.751,295.53 146.47,295.53 147,295 147,280 ; ws134.3@143.751,310.529 144,310.778 144,313.823 ; C153.2@151.15,306 C159.2@151.15,216 C171.2@151.15,36 151.15,33.45 150.85,33.15 ; ws170.3@158.751,55.529 161.471,55.529 162,55 ; ws169.3@158.751,70.53 161.47,70.53 162,70 ; ws168.3@158.751,85.529 161.471,85.529 162,85 ; ws167.3@158.751,100.53 161.47,100.53 162,100 ; ws166.3@158.751,115.53 161.47,115.53 162,115 ; ws165.3@158.751,130.53 161.47,130.53 162,130 ; ws164.3@158.751,145.53 161.47,145.53 162,145 ; ws163.3@158.751,160.529 161.471,160.529 162,160 ; ws162.3@158.751,175.53 161.47,175.53 162,175 ; ws161.3@158.751,190.53 161.53,190.53 161.53,190.47 162,190 ; ws160.3@158.751,205.53 161.47,205.53 162,205 ; ws159.3@158.751,220.53 161.47,220.53 162,220 ; ws158.3@158.751,235.529 161.529,235.529 162,236 ; ws157.3@158.751,250.53 161.47,250.53 162,250 ; ws156.3@158.751,265.529 161.471,265.529 162,265 ; ws155.3@158.751,280.53 161.47,280.53 162,280 ; ws154.3@158.751,295.53 161.47,295.53 162,295 162,280 ; ws153.3@159,310.778 159,313.823 ; C172.2@166.15,306 C178.2@166.15,216 C190.2@166.15,36 166.15,33.45 165.85,33.15 ; ws189.3@173.751,55.53 176.47,55.53 177,55 ; ws188.3@173.751,70.53 176.47,70.53 177,70 ; ws187.3@173.751,85.529 176.471,85.529 177,85 ; ws186.3@173.751,100.53 176.47,100.53 177,100 ; ws185.3@173.751,115.53 176.47,115.53 177,115 ; ws184.3@173.751,130.53 176.47,130.53 177,130 ; ws183.3@173.751,145.53 176.47,145.53 177,145 ; ws182.3@173.751,160.529 176.471,160.529 177,160 ; ws181.3@173.751,175.53 176.47,175.53 177,175 ; ws180.3@173.751,190.529 176.471,190.529 177,190 ; ws179.3@173.751,205.53 176.47,205.53 177,205 ; ws178.3@173.751,220.53 176.47,220.53 177,220 ; ws177.3@173.751,235.53 176.47,235.53 177,235 ; ws176.3@173.751,250.53 176.47,250.53 177,250 ; ws175.3@173.751,265.529 176.471,265.529 177,265 ; ws174.3@173.751,280.53 176.47,280.53 177,280 ; ws173.3@173.751,295.53 176.47,295.53 177,295 177,280 ; ws172.3@173.751,310.53 174,310.778 174,313.823 ; C191.2@181.15,306 C203.2@181.15,126 181.15,33.45 180.85,33.15 ; ws208.3@188.751,55.53 191.47,55.53 192,55 ; ws207.3@188.751,70.53 191.47,70.53 192,70 ; ws206.3@188.751,85.529 191.471,85.529 192,85 ; ws205.3@188.751,100.53 191.47,100.53 192,100 ; ws204.3@188.751,115.529 191.471,115.529 192,115 ; ws203.3@188.751,130.53 191.53,130.53 191.53,130.47 192,130 ; ws202.3@188.751,145.53 191.47,145.53 192,145 ; ws201.3@188.751,160.53 191.47,160.53 192,160 ; ws200.3@188.751,175.53 191.47,175.53 192,175 ; ws199.3@188.751,190.529 191.471,190.529 192,190 ; ws198.3@188.751,205.53 191.47,205.53 192,205 ; ws197.3@188.751,220.53 191.47,220.53 192,220 ; ws196.3@188.751,235.53 191.47,235.53 192,235 ; ws195.3@188.751,250.53 191.47,250.53 192,250 ; ws194.3@188.751,265.529 191.471,265.529 192,265 ; ws193.3@188.751,280.53 191.47,280.53 192,280 ; ws192.3@188.751,295.529 191.471,295.529 192,295 192,280 ; ws191.3@188.751,310.53 189,310.778 189,313.823 ; C210.2@196.15,306 C222.2@196.15,126 C228.2@196.15,36 196.15,33.45 195.922,33.222 ; ws227.3@203.751,55.53 206.47,55.53 207,55 ; ws226.3@203.751,70.53 206.47,70.53 207,70 ; ws225.3@203.751,85.53 206.47,85.53 207,85 ; ws224.3@203.751,100.53 206.47,100.53 207,100 ; ws223.3@203.751,115.529 206.471,115.529 207,115 ; ws222.3@203.751,130.53 206.47,130.53 207,130 ; ws221.3@203.751,145.53 206.47,145.53 207,145 ; ws220.3@203.751,160.53 206.47,160.53 207,160 ; ws219.3@203.751,175.53 206.47,175.53 207,175 ; ws218.3@203.751,190.529 206.471,190.529 207,190 ; ws217.3@203.751,205.53 206.47,205.53 207,205 ; ws216.3@203.751,220.529 206.471,220.529 207,220 ; ws215.3@203.751,235.53 206.47,235.53 207,235 ; ws214.3@203.751,250.53 206.47,250.53 207,250 ; ws213.3@203.751,265.53 206.47,265.53 207,265 ; ws212.3@203.751,280.53 206.47,280.53 207,280 ; ws211.3@203.751,295.529 206.471,295.529 207,295 207,280 ; p3.1@207.4,310.3 203.981,310.3 ws210.3@203.751,310.53 204,310.778 204,313.823 189,313.823 ; 37,33.15 45.85,33.15 ; 37,33.15 31.15,33.15 C19.2@31.15,36 C2.2@31.15,291 C1.2@31.15,306 30.7,306.45 30.7,312.8 31.723,313.823 38.503,313.823 ; 37,33.15 37,38.778 ws19.3@38.751,40.529 42,43.778 42,55 ; 38.503,313.823 42.3,313.823 ; 42,55 42,70 ; 42,70 42,85 ; 42,85 42,100 ; 42,100 42,115 ; 42,115 42,130 ; 42,130 42,145 ; 42,145 42,160 ; 42,160 42,175 ; 42,175 42,190 ; 42,190 42,205 ; 42,205 42,220 ; 42,220 42,235 ; 42,235 42,250 ; 42,250 42,265 ; 42,265 42,280 ; 42.3,313.823 54,313.823 ; 45.85,33.15 52,33.15 ; 52,33.15 60.85,33.15 ; 52,33.15 52,38.778 ws38.3@53.751,40.529 57,43.778 57,55 ; 54,313.823 69,313.823 ; 57,55 57,70 ; 57,70 57,85 ; 57,85 57,100 ; 57,100 57,115 ; 57,115 57,130 ; 57,130 57,145 ; 57,145 57,160 ; 57,160 57,175 ; 57,175 57,190 ; 57,190 57,205 ; 57,205 57,220 ; 57,220 57,235 ; 57,235 57,250 ; 57,250 57,265 ; 57,265 57,280 ; 60.85,33.15 67,33.15 ; 67,33.15 75.85,33.15 ; 67,33.15 67,38.778 ws57.3@68.751,40.53 72,43.778 72,55 ; 69,313.823 84,313.823 ; 72,55 72,70 ; 72,70 72,85 ; 72,85 72,100 ; 72,100 72,115 ; 72,115 72,130 ; 72,130 72,145 ; 72,145 72,160 ; 72,160 72,175 ; 72,175 72,190 ; 72,190 72,205 ; 72,205 72,220 ; 72,220 72,235 ; 72,235 72,250 ; 72,250 72,265 ; 72,265 72,280 ; 75.85,33.15 82,33.15 ; 82,33.15 90.85,33.15 ; 82,33.15 82,38.778 ws76.3@83.751,40.53 87,43.778 87,55 ; 84,313.823 99,313.823 ; 87,55 87,70 ; 87,70 87,85 ; 87,85 87,100 ; 87,100 87,115 ; 87,115 87,130 ; 87,130 87,145 ; 87,145 87,160 ; 87,160 87,175 ; 87,175 87,190 ; 87,190 87,205 ; 87,205 87,220 ; 87,220 87,235 ; 87,235 87,250 ; 87,250 87,265 ; 87,265 87,280 ; 90.85,33.15 97,33.15 ; 97,33.15 105.85,33.15 ; 97,33.15 97,38.778 ws95.3@98.751,40.53 102,43.778 102,55 ; 99,313.823 114,313.823 ; 102,55 102,70 ; 102,70 102,85 ; 102,85 102,100 ; 102,100 102,115 ; 102,115 102,130 ; 102,130 102,145 ; 102,145 102,160 ; 102,160 102,175 ; 102,175 102,190 ; 102,190 102,205 ; 102,205 102,220 ; 102,220 102,235 ; 102,235 102,250 ; 102,250 102,265 ; 102,265 102,280 ; 105.85,33.15 112,33.15 ; 112,33.15 120.85,33.15 ; 112,33.15 112.222,33.372 112.222,39 ws114.3@113.751,40.53 117,43.778 117,55 ; 114,313.823 129,313.823 ; 117,55 117,70 ; 117,70 117,85 ; 117,85 117,100 ; 117,100 117,115 ; 117,115 117,130 ; 117,130 117,145 ; 117,145 117,160 ; 117,160 117,175 ; 117,175 117,190 ; 117,190 117,205 ; 117,205 117,220 ; 117,220 117,235 ; 117,235 117,250 ; 117,250 117,265 ; 117,265 117,280 ; 120.85,33.15 127,33.15 ; 127,33.15 135.85,33.15 ; 127,33.15 127.222,33.372 127.222,39 ws133.3@128.751,40.53 132,43.778 132,55 ; 129,313.823 144,313.823 ; 132,55 132,70 ; 132,70 132,85 ; 132,85 132,100 ; 132,100 132,115 ; 132,115 132,130 ; 132,130 132,145 ; 132,145 132,160 ; 132,160 132,175 ; 132,175 132,190 ; 132,190 132,205 ; 132,205 132,220 ; 132,220 132,235 ; 132,235 132,250 ; 132,250 132,265 ; 132,265 132,280 ; 135.85,33.15 142,33.15 ; 142,33.15 150.85,33.15 ; 142,33.15 142,38.778 ws152.3@143.751,40.53 147,43.778 147,55 ; 144,313.823 159,313.823 ; 147,55 147,70 ; 147,70 147,85 ; 147,85 147,100 ; 147,100 147,115 ; 147,115 147,130 ; 147,130 147,145 ; 147,145 147,160 ; 147,160 147,175 ; 147,175 147,190 ; 147,190 147,205 ; 147,205 147,220 ; 147,220 147,235 ; 147,235 147,250 ; 147,250 147,265 ; 147,265 147,280 ; 150.85,33.15 157,33.15 ; 157,33.15 165.85,33.15 ; 157,33.15 157,38.778 ws171.3@158.751,40.53 162,43.778 162,55 ; 159,313.823 174,313.823 ; 162,55 162,70 ; 162,70 162,85 ; 162,85 162,100 ; 162,100 162,115 ; 162,115 162,130 ; 162,130 162,145 ; 162,145 162,160 ; 162,160 162,175 ; 162,175 162,190 ; 162,190 162,205 ; 162,205 162,220 ; 162,220 162,236 ; 162,236 162,250 ; 162,250 162,265 ; 162,265 162,280 ; 165.85,33.15 172,33.15 ; 172,33.15 180.85,33.15 ; 172,33.15 172,38.778 ws190.3@173.751,40.53 177,43.778 177,55 ; 174,313.823 189,313.823 ; 177,55 177,70 ; 177,70 177,85 ; 177,85 177,100 ; 177,100 177,115 ; 177,115 177,130 ; 177,130 177,145 ; 177,145 177,160 ; 177,160 177,175 ; 177,175 177,190 ; 177,190 177,205 ; 177,205 177,220 ; 177,220 177,235 ; 177,235 177,250 ; 177,250 177,265 ; 177,265 177,280 ; 180.85,33.15 187,33.15 ; 187,33.15 195.85,33.15 195.922,33.222 ; 187,33.15 187,38.778 ws209.3@188.751,40.53 192,43.778 192,55 ; 192,55 192,70 ; 192,70 192,85 ; 192,85 192,100 ; 192,100 192,115 ; 192,115 192,130 ; 192,130 192,145 ; 192,145 192,160 ; 192,160 192,175 ; 192,175 192,190 ; 192,190 192,205 ; 192,205 192,220 ; 192,220 192,235 ; 192,235 192,250 ; 192,250 192,265 ; 192,265 192,280 ; 195.922,33.222 202.222,33.222 202.222,39 ws228.3@203.751,40.529 207,43.778 207,55 ; 207,55 207,70 ; 207,70 207,85 ; 207,85 207,100 ; 207,100 207,115 ; 207,115 207,130 ; 207,130 207,145 ; 207,145 207,160 ; 207,160 207,175 ; 207,175 207,190 ; 207,190 207,205 ; 207,205 207,220 ; 207,220 207,235 ; 207,235 207,250 ; 207,250 207,265 ; 207,265 207,280
Netp2_1: p2.1 ws1.4 | length 3
  Top Layer w0.5: p2.1@32.9,311.6 34.408,311.6 ws1.4@35.484,310.524
Netp3_3: p3.3 ws228.2 | length 271.6
  Top Layer w0.5: ws228.2@203.751,36.106 208.6,40.955 208.6,304.02 p3.3@207.4,305.22
Netws1_2: ws1.2 ws2.4 | length 11.9
  Top Layer w0.5: ws2.4@35.484,295.524 35.484,299.484 36.301,300.301 37.935,301.935 38.751,302.751 ws1.2@38.751,306.106
Netws2_2: ws2.2 ws3.4 | length 11.9
  Top Layer w0.5: ws3.4@35.484,280.524 38.751,283.791 ws2.2@38.751,291.106
Netws3_2: ws3.2 ws4.4 | length 11.9
  Top Layer w0.5: ws4.4@35.484,265.524 38.751,268.791 ws3.2@38.751,276.106
Netws4_2: ws4.2 ws5.4 | length 11.9
  Top Layer w0.5: ws5.4@35.484,250.524 38.751,253.791 ws4.2@38.751,261.106
Netws5_2: ws5.2 ws6.4 | length 11.9
  Top Layer w0.5: ws6.4@35.484,235.524 38.751,238.791 ws5.2@38.751,246.106
Netws6_2: ws6.2 ws7.4 | length 11.9
  Top Layer w0.5: ws7.4@35.484,220.524 38.751,223.791 ws6.2@38.751,231.106
Netws7_2: ws7.2 ws8.4 | length 11.9
  Top Layer w0.5: ws8.4@35.484,205.524 38.751,208.791 ws7.2@38.751,216.106
Netws8_2: ws8.2 ws9.4 | length 11.9
  Top Layer w0.5: ws9.4@35.484,190.524 38.751,193.791 ws8.2@38.751,201.106
Netws9_2: ws9.2 ws10.4 | length 11.9
  Top Layer w0.5: ws10.4@35.484,175.524 38.751,178.791 ws9.2@38.751,186.106
Netws10_2: ws10.2 ws11.4 | length 11.9
  Top Layer w0.5: ws11.4@35.484,160.524 38.751,163.791 ws10.2@38.751,171.106
Netws11_2: ws11.2 ws12.4 | length 11.9
  Top Layer w0.5: ws12.4@35.484,145.524 38.751,148.791 ws11.2@38.751,156.106
Netws12_2: ws12.2 ws13.4 | length 11.9
  Top Layer w0.5: ws13.4@35.484,130.524 38.751,133.791 ws12.2@38.751,141.106
Netws13_2: ws13.2 ws14.4 | length 11.9
  Top Layer w0.5: ws14.4@35.484,115.524 38.751,118.791 ws13.2@38.751,126.106
Netws14_2: ws14.2 ws15.4 | length 11.9
  Top Layer w0.5: ws15.4@35.484,100.524 38.751,103.791 ws14.2@38.751,111.106
Netws15_2: ws15.2 ws16.4 | length 11.9
  Top Layer w0.5: ws16.4@35.484,85.524 38.751,88.791 ws15.2@38.751,96.106